# Altium PCB PCB1.PcbDoc
Units mm, origin at the board's own origin, x right, y up, seen from the top; angles counter-clockwise.
Board outline 26 x 26 mm, 2 copper layers (Top Layer, Bottom Layer); 4 components, 5 nets, 25 pads, 0 vias.
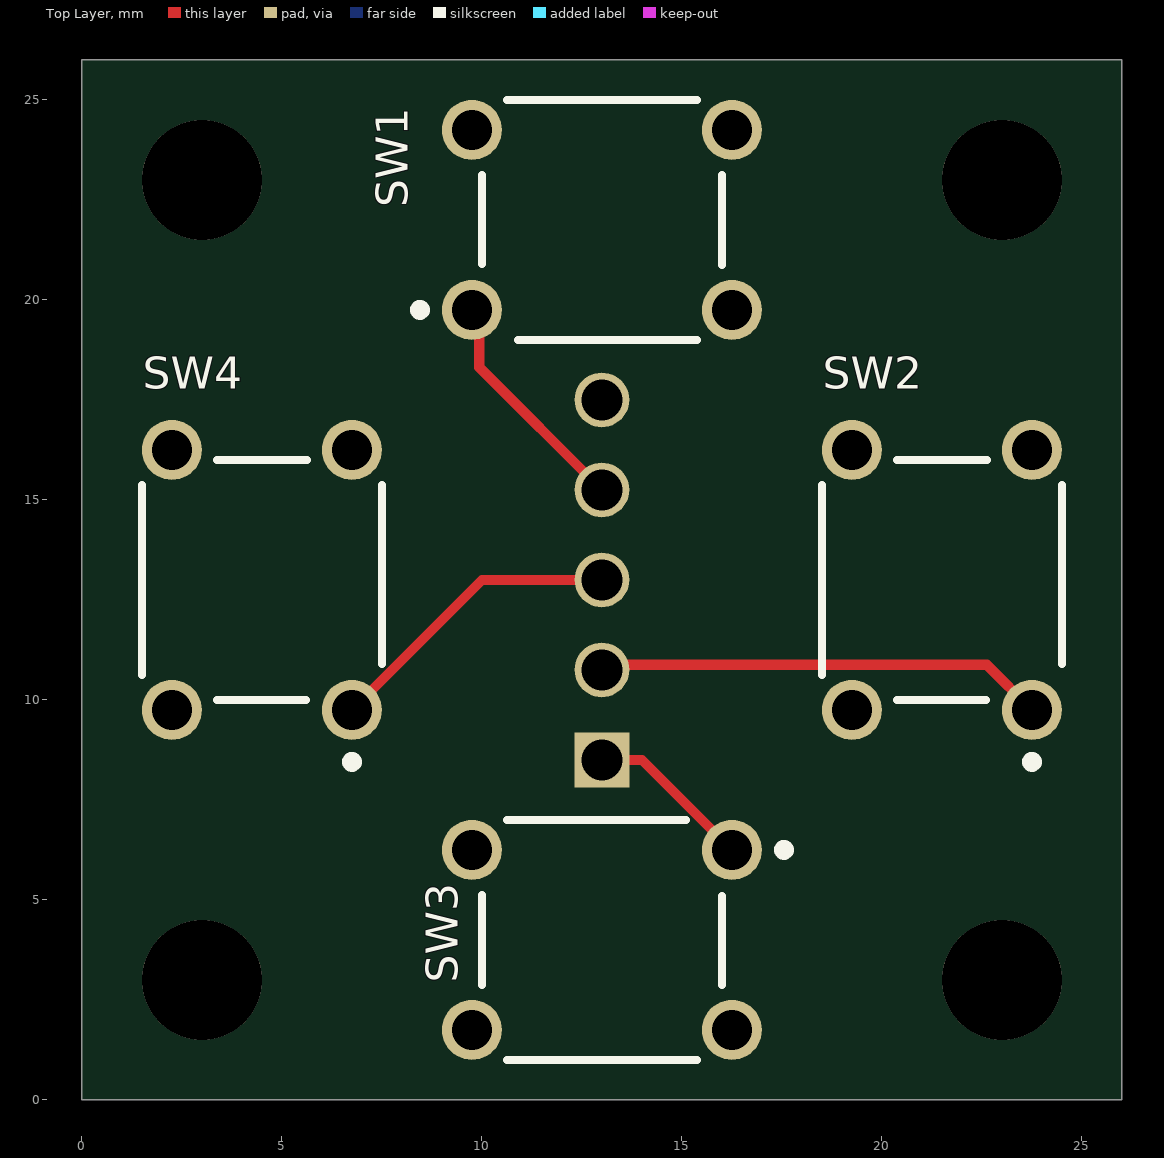
[diagram p0: Top Layer view]
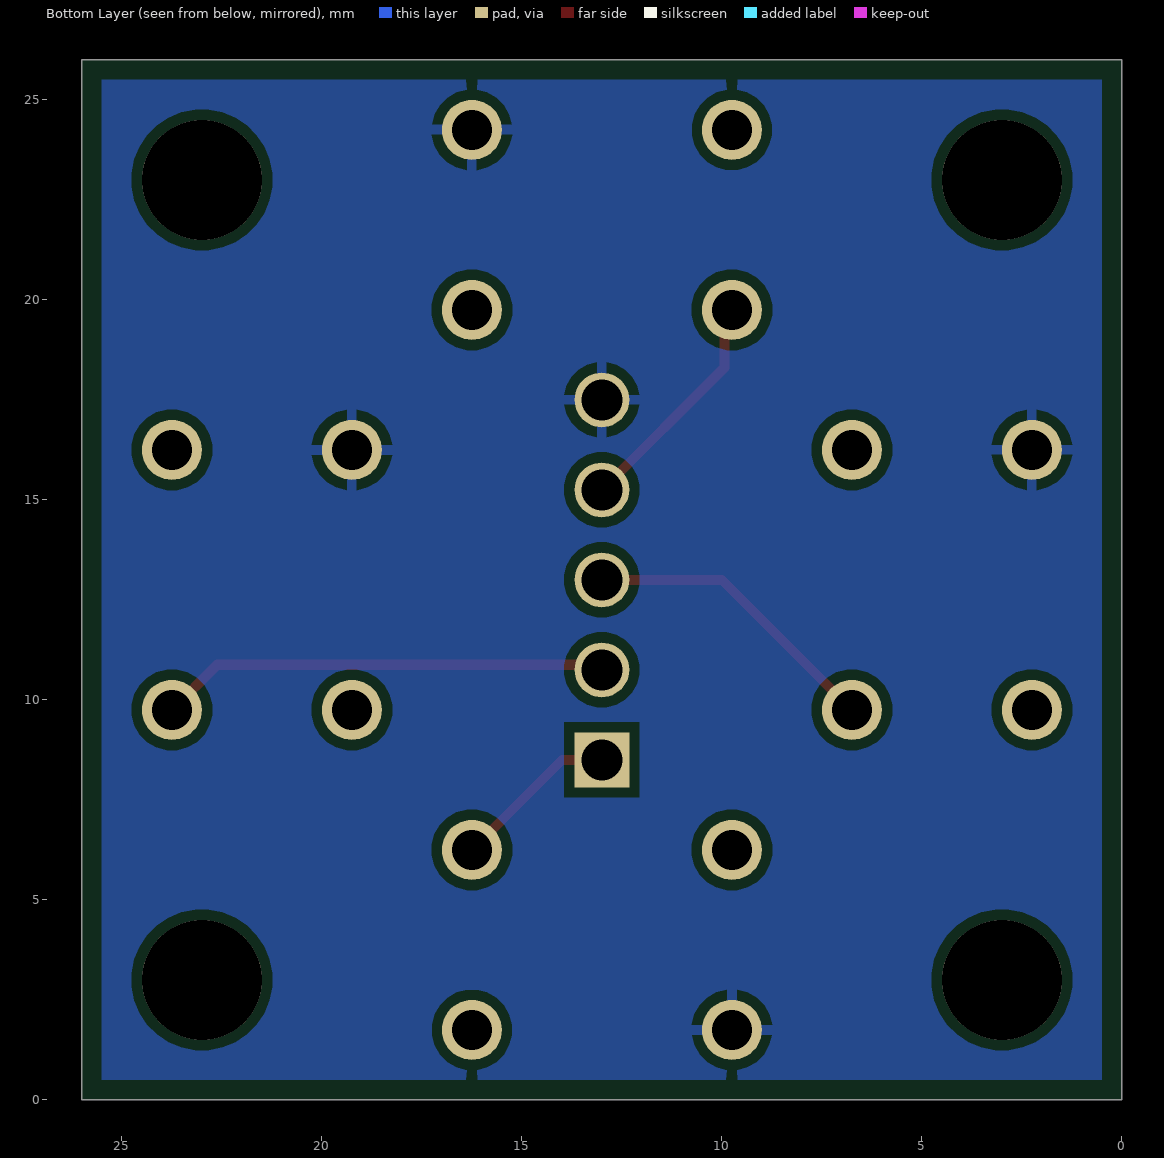
[diagram p1: Bottom Layer view, seen from below]
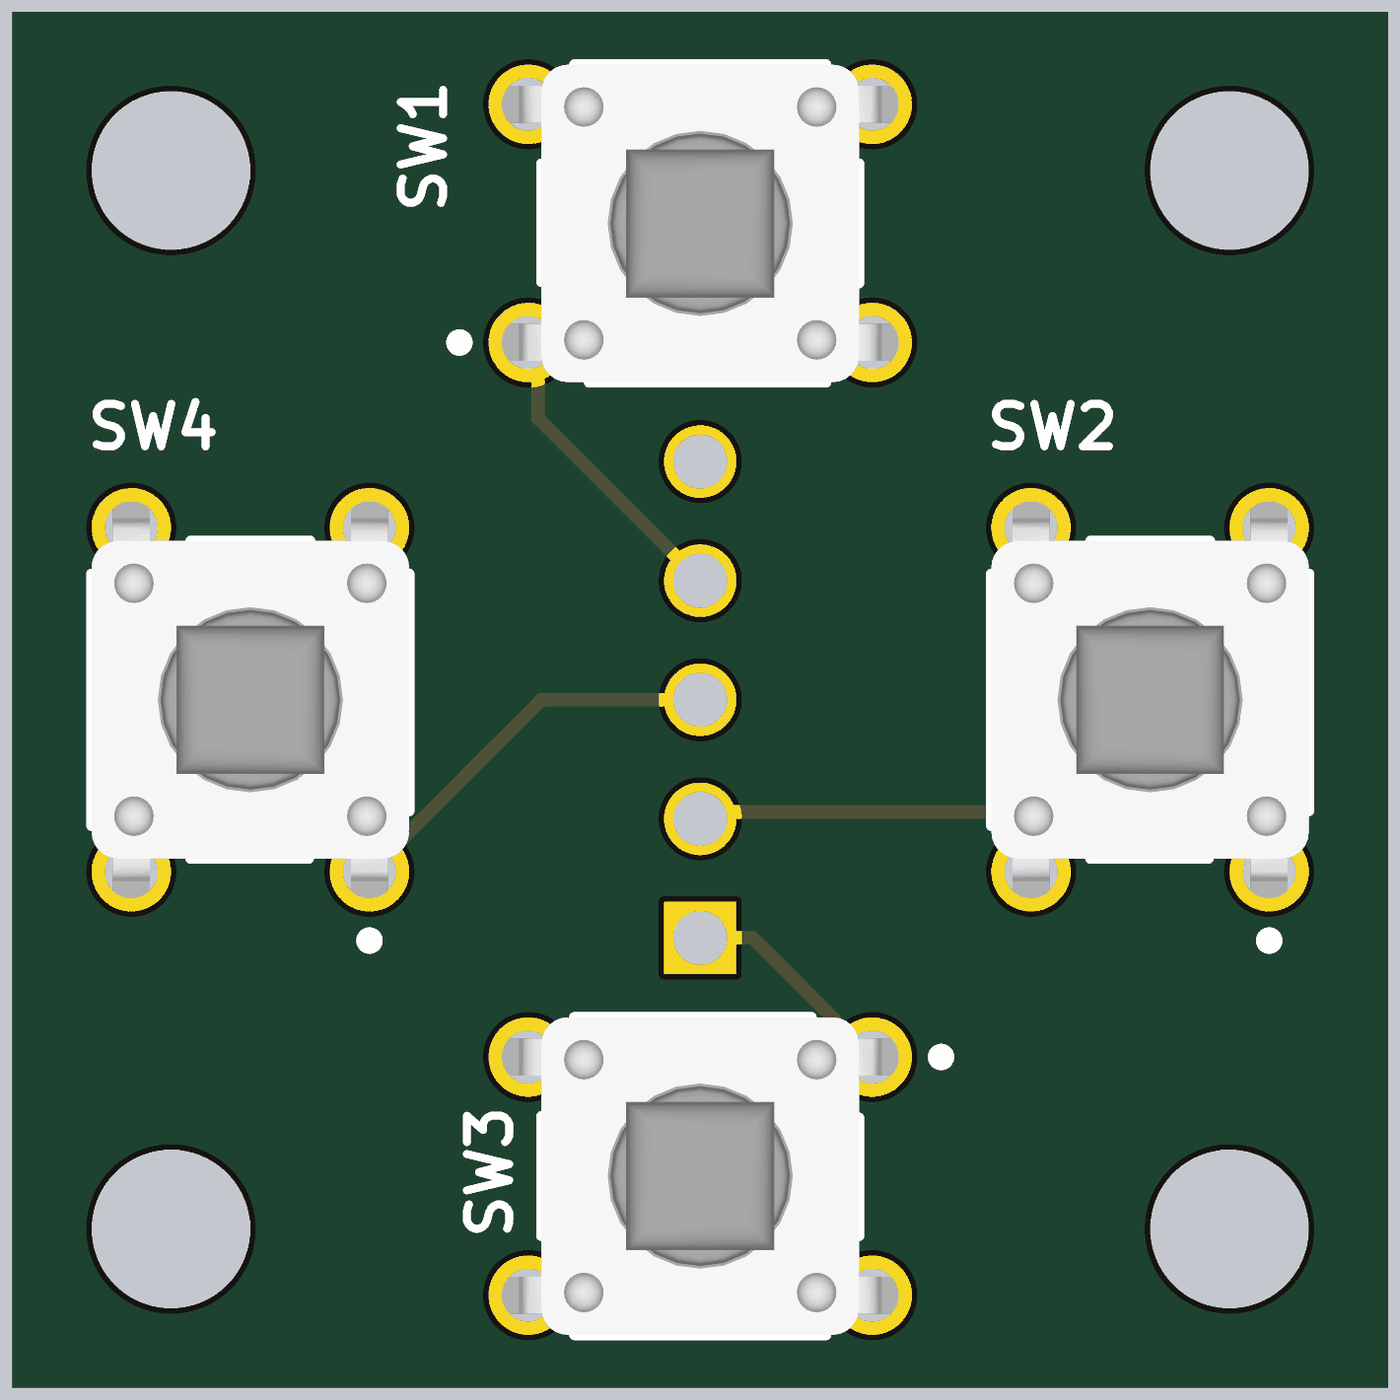
[diagram p2: 3D render of the assembled board from above, using the file's embedded part models]

## Layer stack, top to bottom
Top Solder: solder mask 0.0102, Solder Resist, Dk 3.5
Top Layer: signal copper 0.0356
Dielectric 1: dielectric 0.32, FR-4, Dk 4.8
Bottom Layer: signal copper 0.0356
Bottom Solder: solder mask 0.0102, Solder Resist, Dk 3.5

## Board outline
0,0 0,26 26,26 26,0

## Design rules (kind name [scope] priority, off if disabled: settings)
Clearance [All] p1: gap=0.254 ignorepadtopadclearanceinfootprint=FALSE
HoleSize [All] p1: absolutevalues=TRUE maxlimit=3.5 minlimit=0.025 maxpercent=80.000 minpercent=20.000
PolygonConnect [All] p1: connectstyle=Relief reliefconductorwidth=0.254 reliefentries=4 polygonreliefangle="90 Angle" airgapwidth=0.254
RoutingVias [All] p1: holewidth=0.711 width=1.27 viastyle="Through Hole" minholewidth=0.711 minwidth=1.27 maxholewidth=0.711 maxwidth=1.27
SolderMaskExpansion [All] p1: expansion=0.102 istentingtop=FALSE
SupplyNets "Schematic Supply Nets_4" [InNet('GND')] p1: voltage=0.000
SupplyNets "Schematic Supply Nets_3" [InNet('D')] p2: voltage=0.000
SupplyNets "Schematic Supply Nets_2" [InNet('B')] p3: voltage=0.000
SupplyNets "Schematic Supply Nets_1" [InNet('A')] p4: voltage=0.000
SupplyNets "Schematic Supply Nets" [InNet('C')] p5: voltage=0.000
Width [All] p1: maxlimit=0.254 minlimit=0.254 preferedwidth=0.254
29 further rules are at their usual default settings.

## Components (designator, comment, footprint, x,y, rotation, side; value= is the part's Value field where it differs from the comment)
SW1 "TL1105SPF160Q" ESWI-TL1105SPF_V 13,22 r0 top
SW2 "TL1105SPF160Q" ESWI-TL1105SPF_V 21.5,13 r90 top
SW3 "TL1105SPF160Q" ESWI-TL1105SPF_V 13,4 r180 top
SW4 "TL1105SPF160Q" ESWI-TL1105SPF_V 4.5,13 r90 top

## Footprints (in the part's own frame and the unit in brackets; to place one, negate y for a bottom-side part, rotate by r counter-clockwise, add the part's x,y. Pads: shape width x height; smd on the part's side, far side on the other; paste and mask are expansions set on the pad)
ESWI-TL1105SPF_V [mm] "THD, 4-Leads, Body 6x6mm"
  round 1.5 hole 1: 1(-3.25,-2.25) 2(3.25,-2.25) 3(-3.25,2.25) 4(3.25,2.25)
  silkscreen extent -4.67,-3 3,3, body extent -3.95,-3 3.95,3, height 7.4

## Part data
SW1 SW2 SW3 SW4: library part CMP-2000-07248-1, "Tact Switch, SPST-NO, 50 mA, 12 VDC, -20 to 70 degC, 4-Pin THD, RoHS, Bulk", Manufacturer=E-Switch, Package Description="4-Pin Through Hole Device, Body 6 x 6 mm", Package Reference=TL1105SPF, Actuation Force=1.6N, Actuator Style=RoundButton, Contact Material=Silver, Datasheet URL=https://www.e-switch.com/system/asset/product_line/data_sheet/140/TL1105.pdf, Datasheet Version=12/2013, Manufacturer URL=http://www.e-switch.ch/en/, Mounting Technology=ThroughHole, Package URL=http://spec_sheets.e-switch.com/specs/P010201.pdf, Size=6x6mm, Termination Style=RightAngle

## Free pads (board coordinates)
  rect 1.37x1.37 hole 1.02: 1(13,8.5)
  round 1.37 hole 1.02: 2(13,10.75) 3(13,13) 4(13,15.25) 5(13,17.5)
  round 3 hole 3 unplated: ""(3,3) ""(3,23) ""(23,3) ""(23,23)

## Nets (pads, with @x,y where several pads share a name; then routed paths per layer and width w, separated by ;. In a path a pad name is that pad's centre, name@x,y a point inside that pad or via, vN(x,y) a via of type N, cw(c..) or ccw(c..) an arc to the next point about the centre after c; other vN are vias at no path point)
A: pad.1 SW3.1 | length 4.2
  Top Layer w0.254: pad.1 14,8.5 SW3.1
B: pad.2 SW2.1 | length 11.3
  Top Layer w0.254: pad.2 13.131,10.881 22.619,10.881 SW2.1
C: pad.3 SW4.1 | length 7.6
  Top Layer w0.254: SW4.1 10,13 pad.3
D: pad.4 SW1.1 | length 5.8
  Top Layer w0.254: SW1.1 9.933,19.567 9.933,18.317 pad.4
GND: pad.5 SW1.4 SW2.4 SW3.4 SW4.4
pads on no net: SW1.2 SW1.3 SW2.2 SW2.3 SW3.2 SW3.3 SW4.2 SW4.3

## Polygon pours and split planes (outlines as drawn)
GND on Bottom Layer "GND_L02_P000" (solid, pour order 0): 25.5,25.5 25.5,0.5 0.5,0.5 0.5,25.5

## Silkscreen, mask and mechanical layers (free items; w line width, h text height)
Mechanical 1:
  the board outline again, w0.8
Mechanical 15:
  lines w0.1: 11.857,6.737 11.857,19.183 14.143,19.183 14.143,6.737 11.857,6.737